# Altium PCB DO NOT USE LKAS-EPS_PCB_V2I3.PcbDoc (part 2 of 2)
Units mil, origin at the board's own origin, x right, y up, seen from the top; angles counter-clockwise.
Board outline 2098 x 1350 mil, 4 copper layers (Top Layer, Layer 1, Layer 2, Bottom Layer), stack 23.712 mil thick; 50 components, 66 nets, 279 pads, 105 vias.
Unrouted connection lines stored in the file: 1.
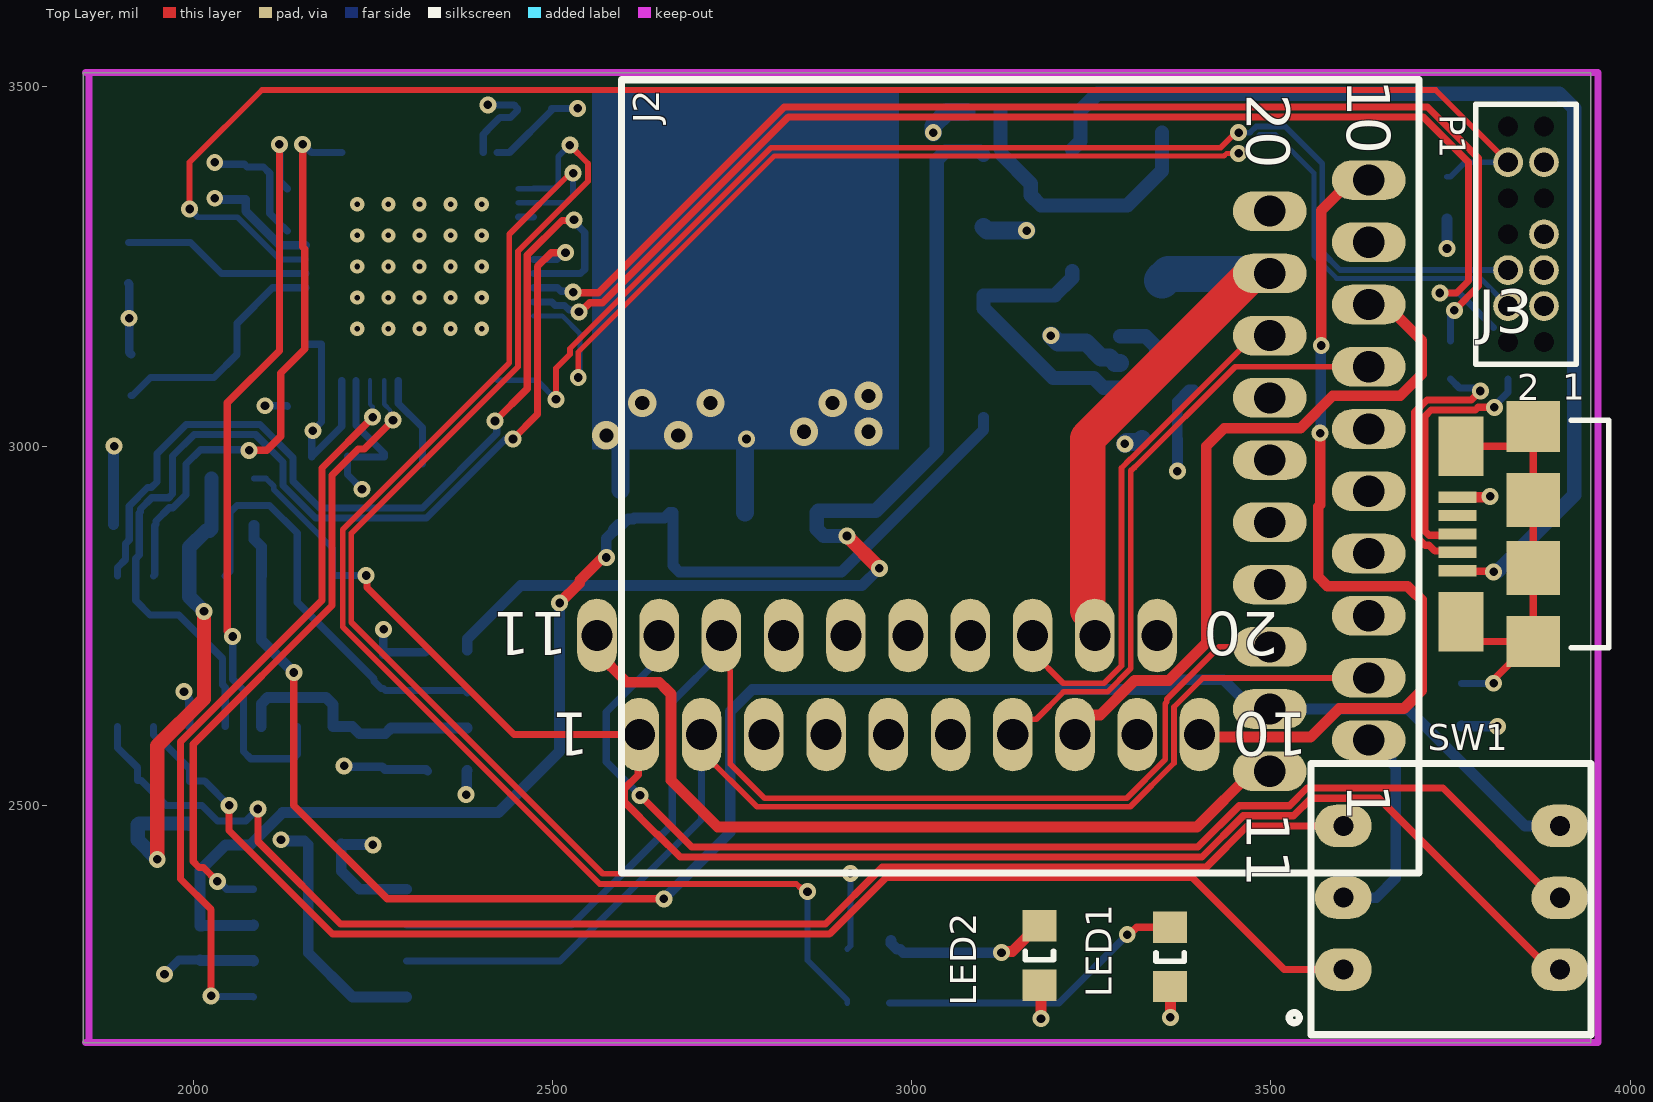
[diagram p0: Top Layer view]

## Via types
v1: diameter 23.62, hole 12, Top Layer to Bottom Layer, 72 vias
v2: diameter 19.68, hole 7.87, Top Layer to Bottom Layer, 25 vias
v3: diameter 39.37, hole 19.68, Top Layer to Bottom Layer, 8 vias

## Nets (pads, with @x,y where several pads share a name; then routed paths per layer and width w, separated by ;. In a path a pad name is that pad's centre, name@x,y a point inside that pad or via, vN(x,y) a via of type N, cw(c..) or ccw(c..) an arc to the next point about the centre after c; other vN are vias at no path point) (continued)
UART3_RX: R7.1 U4.1 U5.31 U6.31 | length 1298.3
  Top Layer w10: v1(2420,3035) 2465,3080 2465,3265.86 2513.19,3314.05 2529.05,3314.05 v1(2530,3315)
  Bottom Layer w10: U4.1 1894.71,2831.15 1906,2842.44 1906,2864.58 1911.05,2869.62 1911.05,2916.85 1936.49,2942.29 1941.73,2942.29 1949.53,2950.09 R7.1 1949.53,2989.33 1990.2,3030 2092.82,3030 2139,2983.82 2139,2951 2176,2914 2319,2914 2422.5,3017.5 2422.5,3032.5 v1(2420,3035) ; U5.31 2539.14,3240.16 2545,3246.02 2545,3297.33 2530,3312.33 v1(2530,3315)
UART3_TX: U4.11 U5.30 U6.30 | length 1435.4
  Top Layer w10: v1(2445.07,3009.93) 2479,3043.86 2479,3250 2498.22,3269.22 v1(2518.19,3269.22)
  Bottom Layer w10: U4.11 2044.71,2664.2 2041,2667.91 2041,2704 1980,2765 1940,2765 1920,2785 1920,2843.38 1925.05,2848.43 1925.05,2906.81 1926.51,2908.27 1926.51,2912.51 1942.29,2928.29 1966.05,2928.29 1971.32,2933.56 1971.32,2986.32 2001,3016 2087.02,3016 2125,2978.02 2125,2960.2 2125,2945.2 2170.2,2900 2185.2,2900 2324.8,2900 2434.73,3009.93 v1(2445.07,3009.93) ; U5.30 2506.04,3259.84 2515.42,3269.22 v1(2518.19,3269.22)
USB_N: R14.1 U5.32 U6.32 | length 1725.3
  Top Layer w10: v1(2528.87,3214.3) 2529.64,3213.52 2564.04,3213.52 2822.52,3472 3717.8,3472 3749.9,3439.9 3764.5,3425.3 3789,3400.8 3789,3222.69 v1(3755.23,3188.92)
  Bottom Layer w10: U5.32 2507.21,3220.47 2512.17,3215.51 2527.65,3215.51 v1(2528.87,3214.3) ; R14.1 3750,3180 3755.23,3185.23 v1(3755.23,3188.92)
USB_P: R15.1 U5.33 U6.33 | length 1754.2
  Top Layer w10: v1(2536.9,3186.82) 2539.09,3186.82 2551.79,3199.53 2569.84,3199.53 2828.32,3458 3712,3458 3744.04,3425.96 3758.7,3411.3 3775,3395 3775,3230 3758.19,3213.19 3739.62,3213.19 3737.31,3215.5 v1(3735,3213.19)
  Bottom Layer w10: U5.33 2499.06,3200.79 2504.02,3195.83 2516.85,3195.83 2523.25,3189.43 2534.29,3189.43 v1(2536.9,3186.82) ; v1(3735,3213.19) 3761.81,3213.19 3809.76,3165.24
USB_R_N: J3.2 R14.2 | length 392.6
  Top Layer w10: J3.2 3757.96,2853.89 3728.11,2853.89 3719.97,2862.03 3714.19,2862.03 3700.13,2876.09 3700.13,3047.24 3717.03,3064.14 3778.8,3064.14 v1(3791.47,3076.81)
  Bottom Layer w10: R14.2 3762.72,3080.71 3783.88,3080.71 3787.78,3076.81 v1(3791.47,3076.81)
USB_R_P: J3.3 R15.2 | length 357.5
  Top Layer w10: J3.3 3757.96,2876.03 3719.99,2876.03 3714.13,2881.89 3714.13,3041.44 3722.83,3050.14 3784.6,3050.14 3788.48,3054.02 v1(3810.79,3054.02)
  Bottom Layer w10: v1(3810.79,3054.02) 3810.79,3055.79 3830,3075 R15.2
V_USB: D1.1 J3.1 | length 1509.8
  Top Layer w10: J3.1 3760.47,2825.79 3809.21,2825.79 v1(3810,2825)
  Bottom Layer w20: D1.1 3235,3424.46 3235,3467.43 3258.09,3490.52 3901.41,3490.52 3921.93,3470 3921.93,2931.93 3815,2825 v1(3810,2825)
pads on no net: J1.3 J1.4 J1.5 J1.6 J1.9 J1.15 J1.16 J1.17 J1.20 J2. J2.3 J2.4 J2.5 J2.6 J2.9 J2.15 J2.16 J2.17 J2.20 J3.4 P1.1 P1.2 P1.8 P1.9 P1.10 P1.13 P1.14 U3.4

## Polygon pours and split planes (outlines as drawn)
GND on Layer 1 (split plane): 3924.9,3499.9 3924.9,2190.1 1867.1,2190.1 1867.1,3499.9
+3V3 on Layer 2 (split plane): 3924.9,3499.9 3924.9,2190.1 1867.1,2190.1 1867.1,3499.9

## Keep-outs
Keep-Out Layer:
  lines w10: 1850,2170 3955,2170 3955,3520 1850,3520 ; 1855,2170 1855,2674 ; 1855,2646.44 1855,3520

## Other copper
Bottom Layer:
  rectangle net GND: 2555,2995 2982.4,3498.27

## Silkscreen, mask and mechanical layers (free items; w line width, h text height)
Top Overlay:
  text "ML2020 V2I1" at 2358.28,4848.16 h60 r270

## Text inside footprints (layer, text, board x,y; h text height)
J1: Top Overlay "1" at 2551,2628.63 h60 r180; Top Overlay "11" at 2521,2768.63 h60 r180; Top Overlay "20" at 3511,2768.63 h60 r180; Top Overlay "10" at 3551,2628.63 h60 r180
J2: Top Overlay "10" at 3606.14,3510.31 h60 r270; Top Overlay "20" at 3466.14,3490.31 h60 r270; Top Overlay "11" at 3466.14,2490.32 h60 r270; Top Overlay "1" at 3606.14,2530.32 h60 r270
J3: Mechanical 1 "PCB Edge" at 3895,2357.76 h39.37 r90
P1: Top Overlay "1" at 3905.31,3064.31 h36; Top Overlay "2" at 3843,3064 h36